# Altium PCB Vobla.PcbDoc
Units mm, origin at the board's own origin, x right, y up, seen from the top; angles counter-clockwise.
Board outline 67.25 x 45.25 mm, 4 copper layers (Top Signal Layer, Power Layer, Ground Layer, Bottom Signal Layer), stack 0.778 mm thick; 72 components, 42 nets, 204 pads, 80 vias.
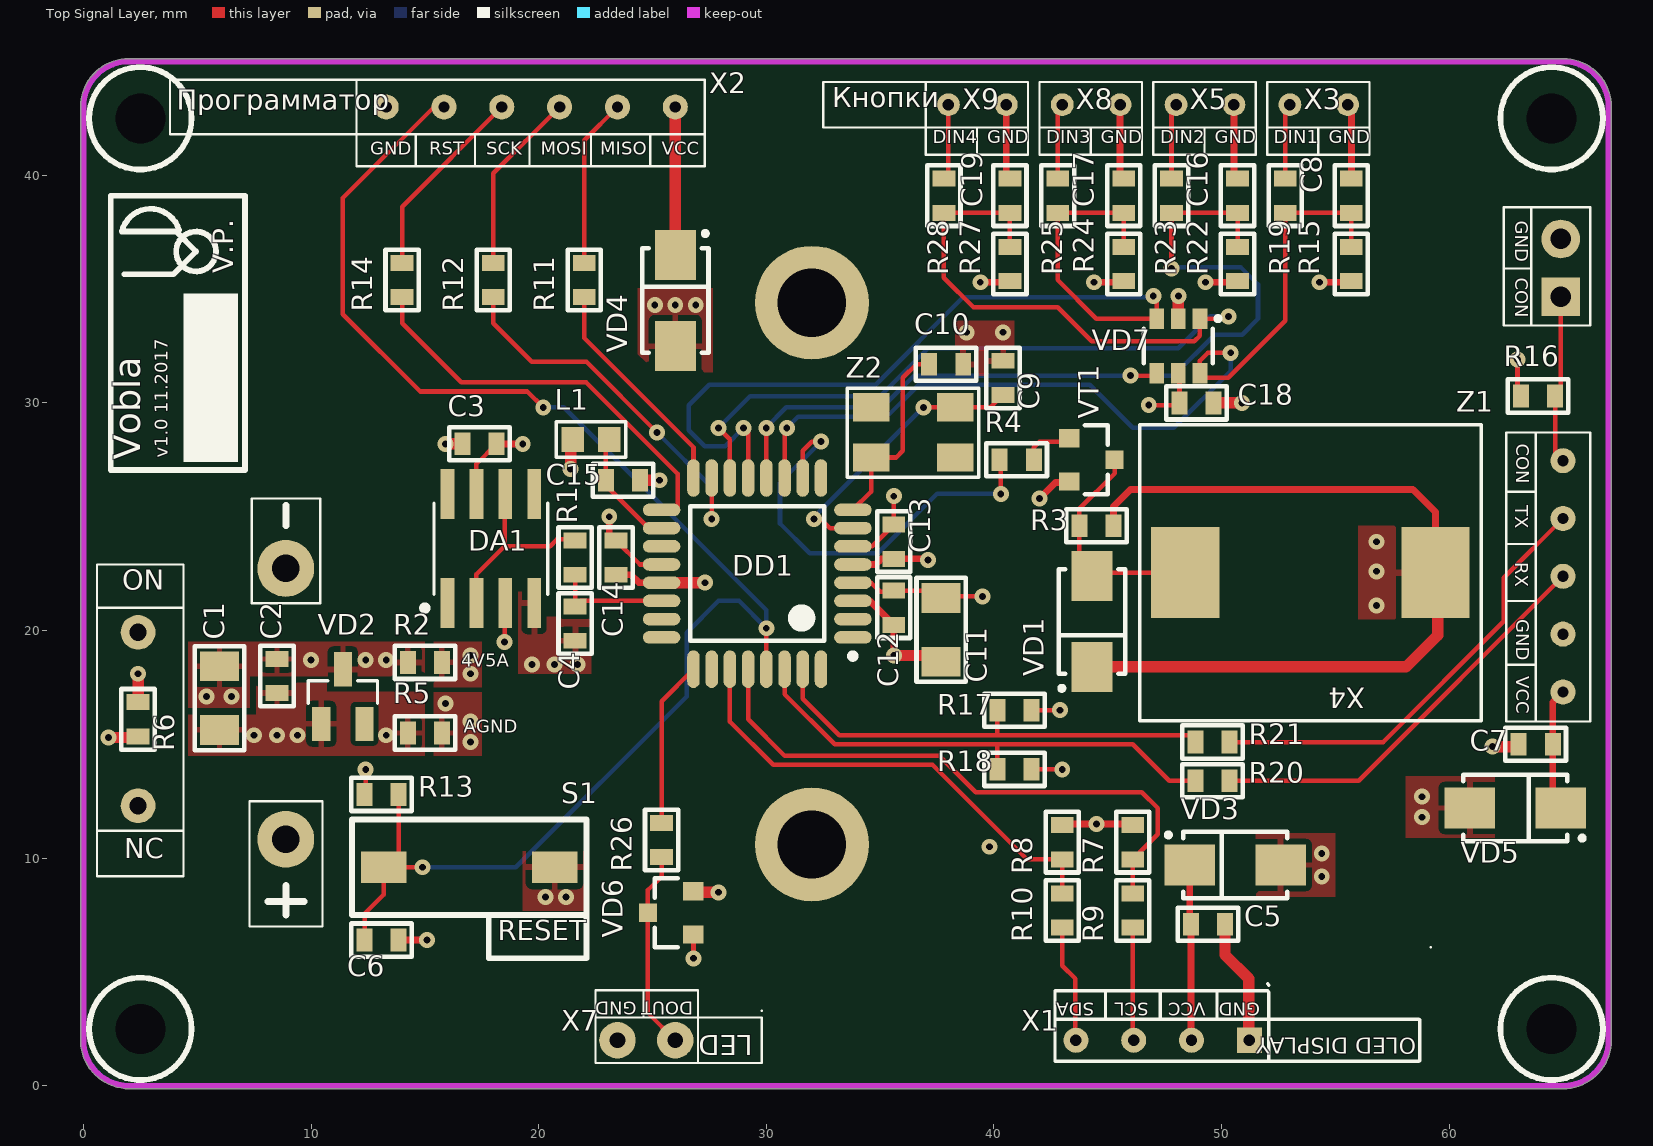
[diagram p0: Top Signal Layer view]
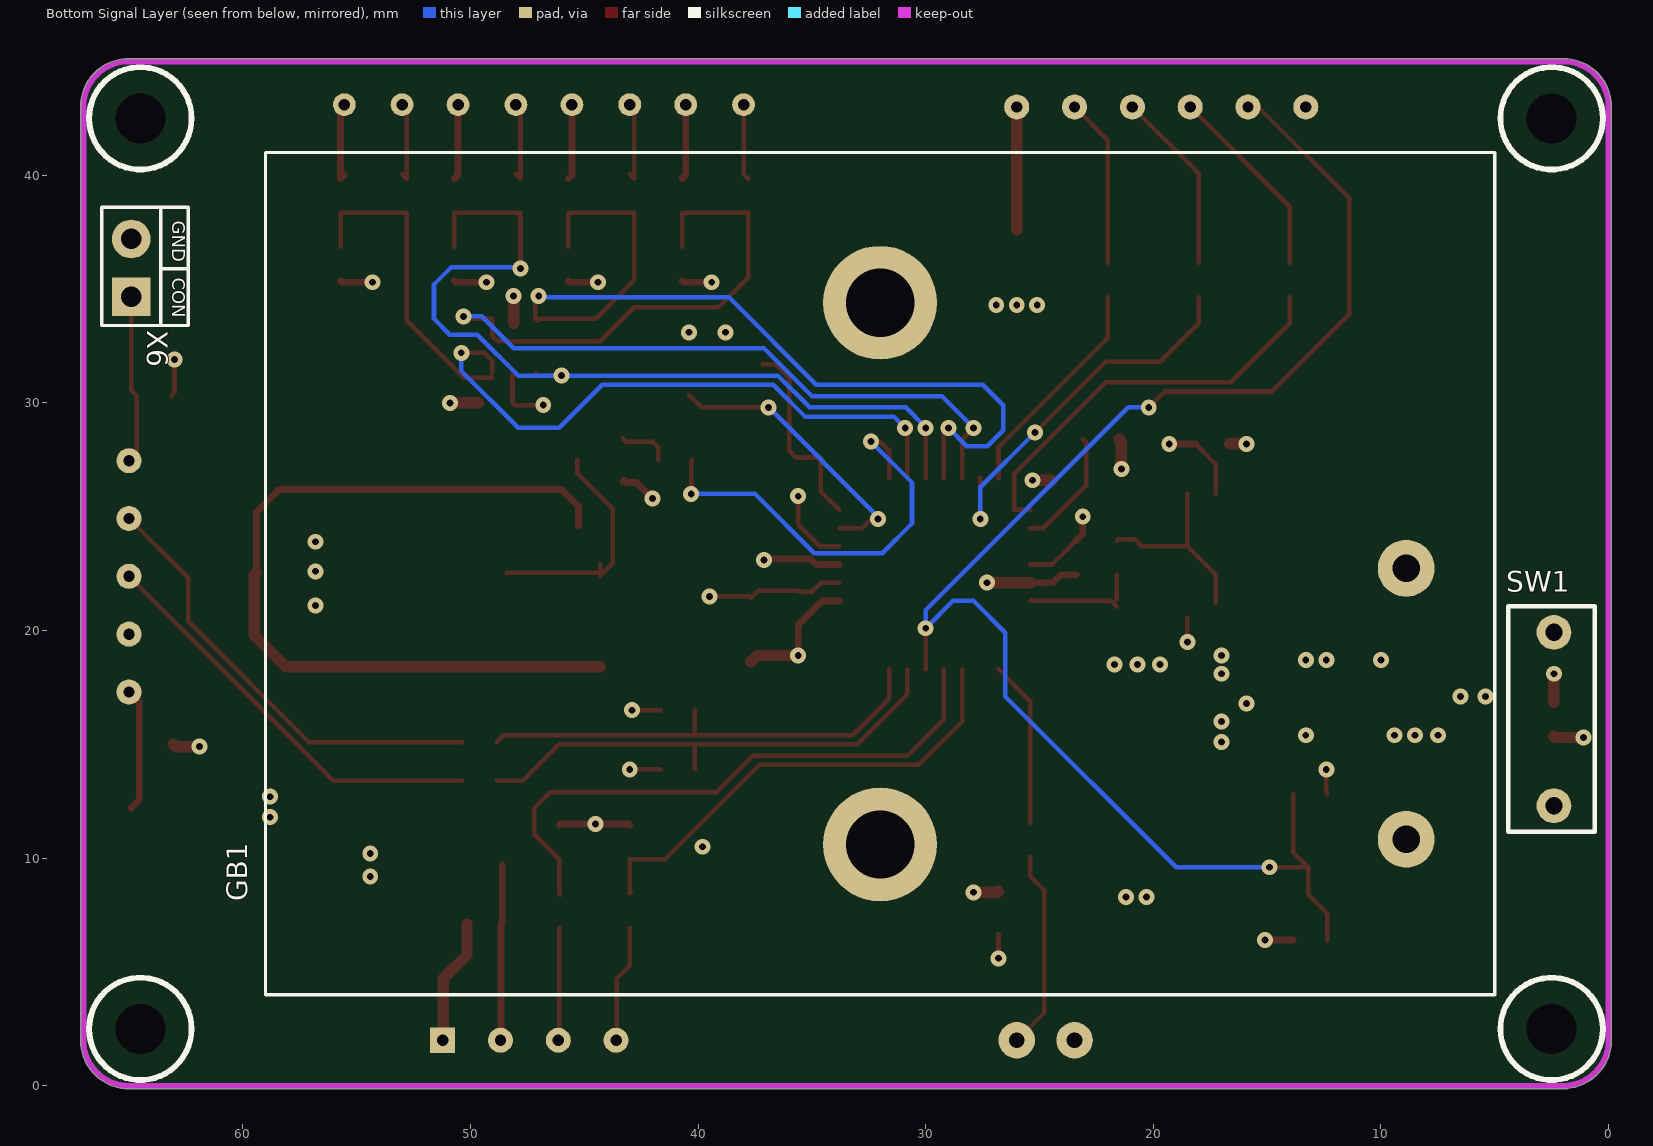
[diagram p1: Bottom Signal Layer view, seen from below]
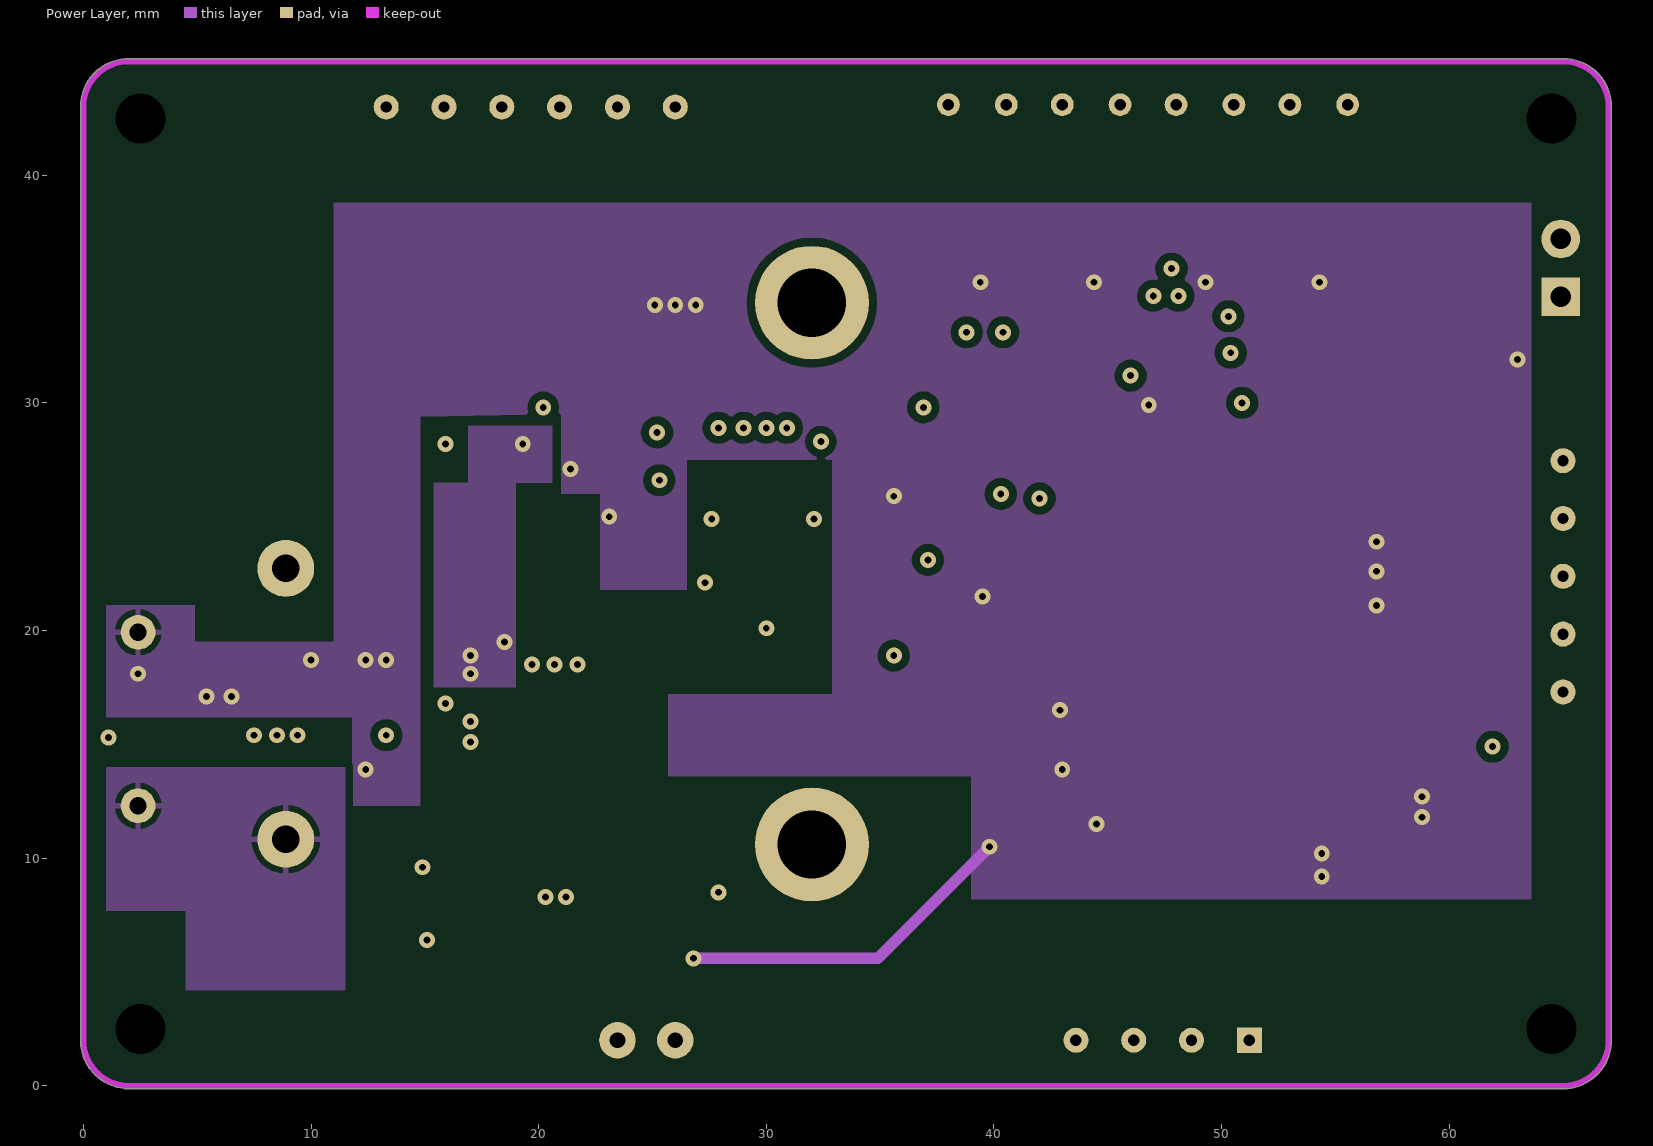
[diagram p2: Power Layer]
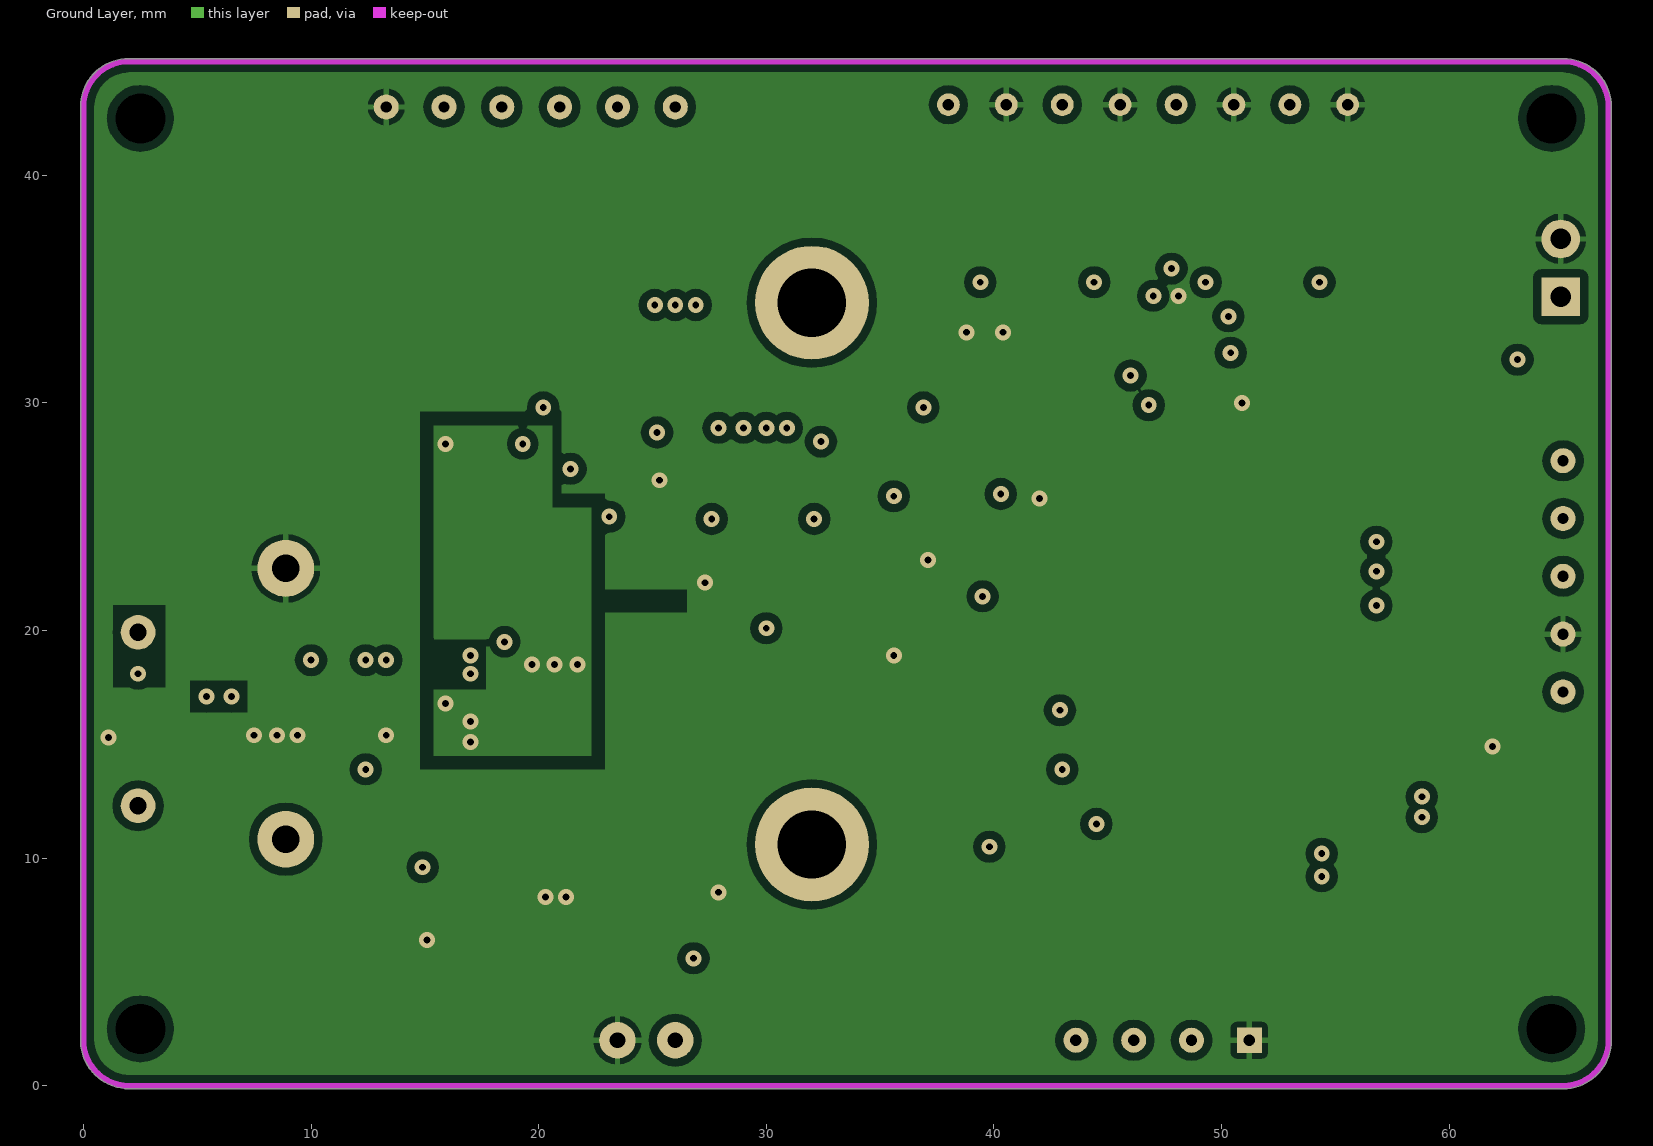
[diagram p3: Ground Layer]
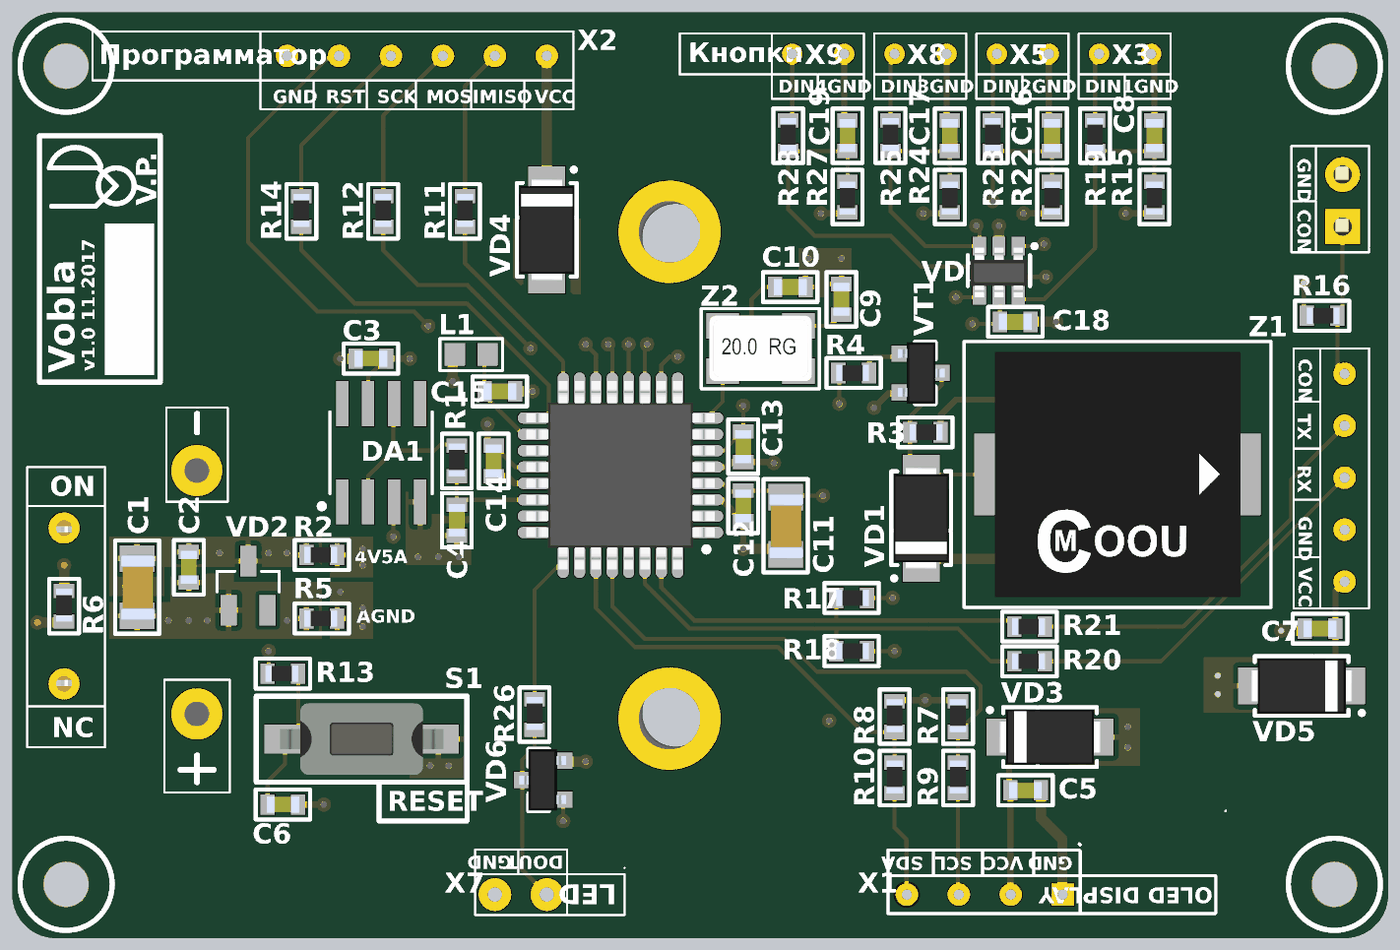
[diagram p4: 3D render of the assembled board from above, using the file's embedded part models]
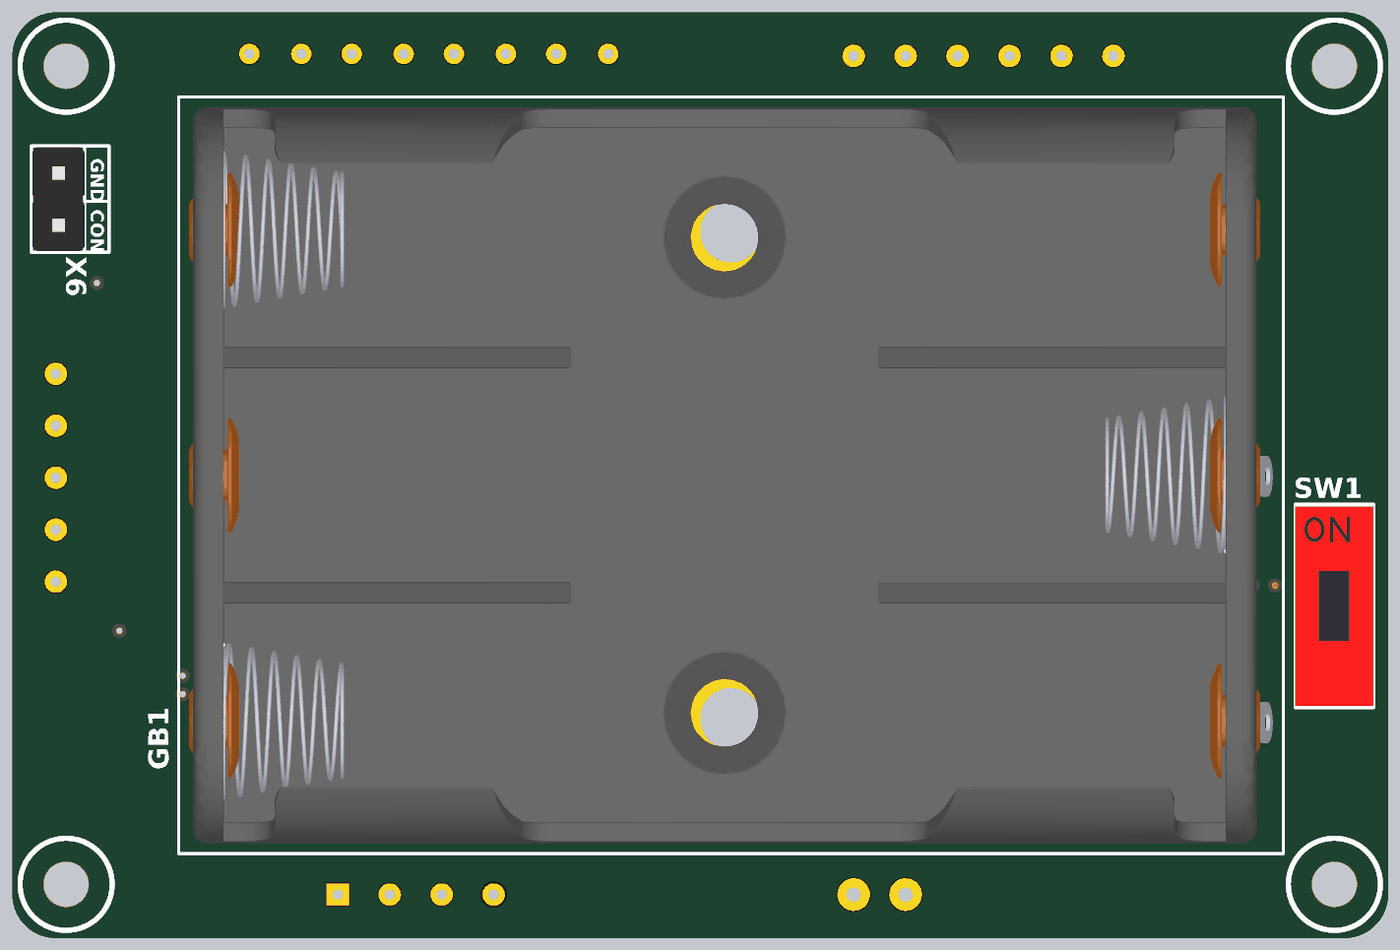
[diagram p5: 3D render of the assembled board from below, using the file's embedded part models]

## Layer stack, top to bottom
Top Solder: solder mask 0.0102, Solder Resist, Dk 3.5
Top Signal Layer: signal copper 0.0356
Dielectric 1: core 0.254, FR-4, Dk 4.2
Power Layer: signal copper 0.036
Dielectric 3: prepreg 0.127, Dk 4.2
Ground Layer: signal copper 0.036
Dielectric 2: core 0.254, FR-4, Dk 4.2
Bottom Signal Layer: signal copper 0.0356
Bottom Solder: solder mask 0.0102, Solder Resist, Dk 3.5

## Board outline
-0.125,1.8 -0.125,1.908 cw(c2,2) -0.127,2 cw(c0,2) -0.125,2.022 -0.125,42.977 cw(c0,43) -0.127,43 cw(c2,43) 2,45.127 cw(c2,45) 2.022,45.125 64.978,45.125 cw(c65,45) 65,45.127 cw(c65,43) 67.127,43 cw(c67,43) 67.125,42.978 67.125,2.022 cw(c67,2) 67.127,2 cw(c65,2) 65,-0.127 cw(c65,0) 64.978,-0.125 2.022,-0.125 cw(c2,0) 2,-0.127 cw(c2,2) -0.112,1.743 cw(c0,1.8)

## Design rules (kind name [scope] priority, off if disabled: settings)
Clearance Clearance_Inner [OnLayer('Power Layer') OR OnLayer('Ground Layer')] p1: gap=0.35 ignorepadtopadclearanceinfootprint=FALSE except(0: Arc-Hole Track-Hole SMDPad-Hole THPad-Hole Via-Hole Fill-Hole Poly-Hole Region-Hole Text-Hole)
Clearance Clearance_1 [All] p2: gap=0.2 ignorepadtopadclearanceinfootprint=FALSE except(0: Arc-Hole Track-Hole SMDPad-Hole THPad-Hole Via-Hole Fill-Hole Poly-Hole Region-Hole Text-Hole)
HoleSize [All] p1: absolutevalues=TRUE maxlimit=10 minlimit=0.025 maxpercent=80.000 minpercent=20.000
MinimumSolderMaskSliver [All] p1: minsoldermaskwidth=0.15
PolygonConnect PolygonConnect_via [IsVia] p1: connectstyle=Direct reliefconductorwidth=0.254 reliefentries=4 polygonreliefangle="90 Angle" airgapwidth=0.254
PolygonConnect PolygonConnect_1 [All] p2: connectstyle=Relief reliefconductorwidth=0.254 reliefentries=4 polygonreliefangle="90 Angle" airgapwidth=0.254
RoutingVias [All] p1: holewidth=0.711 width=1.27 viastyle="Through Hole" minholewidth=0.711 minwidth=1.27 maxholewidth=0.711 maxwidth=1.27
SilkToSilkClearance [All] p1: silktosilkclearance=0
SilkToSolderMaskClearance [IsPad] p1: minsilkscreentomaskgap=0 clearancetoexposedcopper=TRUE
SolderMaskExpansion [All] p1: expansion=0.05
Width Width_1 [All] p1: maxlimit=1 minlimit=0.1 preferedwidth=0.2
Width Width_3.3V [InNet('3,3В')] p2: maxlimit=1 minlimit=0.1 preferedwidth=0.7
26 further rules are at their usual default settings.

## Components (designator, comment, footprint, x,y, rotation, side; value= is the part's Value field where it differs from the comment)
C1 "10мк" C1206 6,17 r270 top
C2 "2,2мк" C0603 8.5,18 r270 top
C3 "0,1мк" C0603 17.4,28.2 r0 top
C4 "0,1мк" C0603 21.6,20.3 r90 top
C5 "0,1мк" C0603 49.4,7.1 r180 top
C6 "0,1мк" C0603 13.1,6.4 r180 top
C7 "0,1мк" C0603 63.8,15 r0 top
C8 "0,1мк" C0603 55.7,39.1 r270 top
C9 "16" C0603 40.4,31.1 r270 top
C10 "16" C0603 37.9,31.7 r180 top
C11 "10мк" C1206 37.7,20 r270 top
C12 "0,1мк" C0603 35.6,21 r90 top
C13 "0,1мк" C0603 35.6,23.9 r90 top
C14 "0,1мк" C0603 23.4,23.2 r90 top
C15 "0,1мк" C0603 23.7,26.6 r180 top
C16 "0,1мк" C0603 50.7,39.1 r270 top
C17 "0,1мк" C0603 45.7,39.1 r270 top
C18 "0,1мк" C0603 48.9,30 r180 top
C19 "0,1мк" C0603 40.7,39.1 r270 top
DA1 "AD8051ARZ" SO8_H 17.9,23.6 r90 top
DD1 "ATmega328P-AU" TQFP-32 29.6,22.5 r180 top
GB1 "Вход питания" KLS5-818-С 32,22.5 r180 bottom
L1 "18мГн" L0603_H 22.3,28.4 r0 top
R1 "1к" R0603 21.6,23.2 r270 top
R2 "0" R0603 15,18.6 r0 top
R3 "1к" R0603 44.5,24.6 r180 top
R4 "1к" R0603 41,27.5 r0 top
R5 "0" R0603 15,15.5 r0 top
R6 "10к" R0603 2.4,16.1 r270 top
R7 "10к" R0603 46.1,10.7 r270 top
R8 "10к" R0603 43,10.7 r270 top
R9 "47" R0603 46.1,7.7 r270 top
R10 "47" R0603 43,7.7 r270 top
R11 "47" R0603 22,35.4 r270 top
R12 "47" R0603 18,35.4 r270 top
R13 "10к" R0603 13.1,12.8 r0 top
R14 "47" R0603 14,35.4 r270 top
R15 "10к" R0603 55.7,36.1 r90 top
R16 "10к" R0603 63.9,30.3 r180 top
R17 "10к" R0603 40.9,16.5 r180 top
R18 "10к" R0603 40.9,13.9 r180 top
R19 "47" R0603 52.8,39.1 r270 top
R20 "47" R0603 49.6,13.4 r0 top
R21 "47" R0603 49.6,15.1 r0 top
R22 "10к" R0603 50.7,36.1 r90 top
R23 "47" R0603 47.8,39.1 r270 top
R24 "10к" R0603 45.7,36.1 r90 top
R25 "47" R0603 42.8,39.1 r270 top
R26 "75" R0603 25.4,10.8 r270 top
R27 "10к" R0603 40.7,36.1 r90 top
R28 "47" R0603 37.8,39.1 r270 top
S1 "RESET" "DTSM 32" 20.7,9.6 r180 top
SW1 "DS1040-01" DIP1 2.4,12.3 r180 bottom
VD1 "SS14" SMA 44.3,20.4 r90 top
VD2 "BZX84-C4V7.215" SOT23-2_H 11.4,17.1 r90 top
VD3 "SS14" SMA 50.6,9.7 r0 top
VD4 "SS14" SMA 26,34.5 r270 top
VD5 "SS14" SMA 62.9,12.2 r180 top
VD6 "BAV199" SOT23-3 25.8,7.6 r180 top
VD7 "TPD4E001" SOT23-6 48.1,32.5 r270 top
VT1 "КТ3130Б9" SOT23-3 44.3,27.5 r0 top
X1 "Модуль DIY SSD1306" 4HOLE_WIRE 43.6,2 r270 top
X2 "Программатор" 6HOLE_WIRE 26,43 r180 top
X3 "Разъем для кнопки №1" 2HOLE_BUTTON 53,43.1 r0 top
X4 "Модуль HC-11" 5HOLE_WIRE 65,17.3 r90 top
X5 "Разъем для кнопки №2" 2HOLE_BUTTON 48,43.1 r0 top
X6 "Перемычка" PLS2-2 64.9,37.2 r0 bottom
X7 "Сигнальный светодиод" 2HOLE_LED 26,2 r180 top
X8 "Разъем для кнопки №3" 2HOLE_BUTTON 43,43.1 r0 top
X9 "Разъем для кнопки №4" 2HOLE_BUTTON 38,43.1 r0 top
Z1 "PKLCS1212E4001" "PIEZOELECTRIC SOUNDER" 53.9,22.54 r0 top
Z2 "8МГц" QSMD3.2X5 34.6,29.8 r0 top

## Footprints (in the part's own frame and the unit in brackets; to place one, negate y for a bottom-side part, rotate by r counter-clockwise, add the part's x,y. Pads: shape width x height; smd on the part's side, far side on the other; paste and mask are expansions set on the pad)
2HOLE_BUTTON [mm] "Разъемы под кнопки"
  round 1 hole 0.5: 1(0,0) 2(2.54,0)
  silkscreen extent -1,-1 3.5,1
2HOLE_LED [mm] "Разъемы под светодиоды"
  round 1.6 hole 0.7: 1(0,0) 2(2.54,0)
  silkscreen extent -1,-1 3.5,1
4HOLE_WIRE [mm] "4 отверстия под провода"
  rect 1.1x1.1 hole 0.5: 1(0,7.62)
  round 1.1 hole 0.5: 2(0,5.08) 3(0,2.54)
  round 1.1 hole 0.5 mask+0.102: 4(0,0)
  silkscreen extent -0.93,-0.92 0.93,8.48
5HOLE_WIRE [mm] "5 отверстиq под провода"
  round 1.1 hole 0.5: 1(0,0) 2(2.54,0) 3(5.08,0) 4(7.62,0) 5(10.16,0)
  silkscreen extent -1.3,-1.2 11.4,1.2
6HOLE_WIRE [mm] "6 отверстий под провода"
  round 1.1 hole 0.5: 1(0,0) 2(2.54,0) 3(5.08,0) 4(7.62,0) 5(10.16,0) 6(12.7,0)
  silkscreen extent -1.3,-1.2 14,1.2
C0603 [mm]
  rect 0.7x1 smd: 1(-0.75,0) 2(0.75,0)
  silkscreen extent -1.33,-0.73 1.33,0.73, body extent -0.8,-0.4 0.8,0.4, height 0.9
C1206 [mm]
  rect 1.3x1.7 smd: 1(-1.428,-0.024) 2(1.372,-0.024)
  silkscreen extent -2.31,-1.1 2.25,1.06, body extent -1.6,-0.85 1.6,0.85, height 1.75
DIP1 [mil]
  round 60 hole 30: 1(0,0) 2(0,300)
  silkscreen extent -79,-45 71,345, body extent -80,-42 71,342, height 269
"DTSM 32" [mm] "Кнопка"
  rect 2x1.4 smd: 1(0,0) 3(7.5,0)
  silkscreen extent -1.4,-2.1 8.9,2.1, body extent -0.25,-1.75 7.75,1.75, height 5.5
KLS5-818-С [mm] "Батарейный отсек 3хААА"
  round 2.5 hole 1.2: 1(23.11,-11.67) 2(23.11,0.23)
  round 5 hole 3: ""(0,-11.9) ""(0,11.9)
  silkscreen extent -27,-18.5 27,18.5, body extent -26.49,-18 26.49,18, height 13
L0603_H [mm]
  rect 1x1.1 smd: 1(-0.8,0) 2(0.8,0)
  silkscreen extent -1.53,-0.78 1.53,0.78, body extent -0.8,-0.4 0.8,0.4, height 0.8
"PIEZOELECTRIC SOUNDER" [mm] "Пьезоэлектрический излучатель"
  rect 3x4 smd: 1(-5.5,0) 2(5.5,0)
  silkscreen extent -7.5,-6.5 7.5,6.5, body extent -6,-6 6,6, height 3.07
PLS2-2 [mm] "Разъем PLS"
  rect 1.7x1.7 hole 0.9: 1(0,2.54)
  round 1.7 hole 0.9: 2(0,0)
  silkscreen extent -1.3,-1.4 1.3,3.8, body extent -1.3,-1.34 1.24,3.74, height 11.54
QSMD3.2X5 [mm] "KX-9A 8MHz"
  rect 1.6x1.25 smd: 1(0,-2.2) 2(3.7,0) ""(0,0) ""(3.7,-2.2)
  silkscreen extent -1.05,-3.08 4.72,0.85, body extent -0.65,-2.7 4.35,0.5, height 1.01
R0603 [mm]
  rect 0.7x1 smd: 1(-0.75,0) 2(0.75,0)
  silkscreen extent -1.33,-0.73 1.33,0.73, body extent -0.85,-0.4 0.75,0.4, height 0.5
SMA [mm]
  rect 2.2x1.8 smd: 1(-2,0) 2(2,0)
  silkscreen extent -3.04,-1.46 2.29,1.46, body extent -2.5,-1.35 2.5,1.35, height 2.15
SO8_H [mm]
  rect 2.2x0.6 smd: 1(-2.4,1.905) 2(-2.4,0.635) 3(-2.4,-0.635) 4(-2.4,-1.905) 5(2.4,-1.905) 6(2.4,-0.635) 7(2.4,0.635) 8(2.4,1.905)
  silkscreen extent -2.74,-2.5 2,3.02, body extent -3.1,-2.5 3.1,2.5, height 1.75
SOT23-2_H [mm]
  rect 1.5x0.8 smd: 0(-1.2,-0.95) 1(1.2,0) 2(-1.2,0.95)
  silkscreen extent -0.3,-1.52 0.7,1.52, body extent -1.3,-1.52 1.3,1.52, height 1.12
SOT23-3 [mm]
  rect 0.9x0.8 smd: 1(-1,0.95) 2(-1,-0.95)
  rect 0.8x0.8 smd: 3(1,0)
  silkscreen extent -0.3,-1.52 0.7,1.52, body extent -1.15,-1.5 1.15,1.5, height 1.1
SOT23-6 [mm]
  rect 0.9x0.64 smd: 1(-1.2,0.95) 2(-1.2,0) 3(-1.2,-0.95) 4(1.2,-0.95) 5(1.2,0) 6(1.2,0.95)
  silkscreen extent -1.3,-1.52 0.75,1.84, body extent -1.13,-1.4 1.3,1.4, height 1.09
TQFP-32 [mm] "Thin QFP, 32-Leads, Body 7x7mm, Pitch 0.8mm, IPC Medium Density"
  oval 1.65x0.55 smd: 1(-4.2,2.8) 2(-4.2,2) 3(-4.2,1.2) 4(-4.2,0.4) 5(-4.2,-0.4) 6(-4.2,-1.2) 7(-4.2,-2) 8(-4.2,-2.8) 17(4.2,-2.8) 18(4.2,-2) 19(4.2,-1.2) 20(4.2,-0.4) 21(4.2,0.4) 22(4.2,1.2) 23(4.2,2) 24(4.2,2.8)
  oval 0.55x1.65 smd: 9(-2.8,-4.2) 10(-2,-4.2) 11(-1.2,-4.2) 12(-0.4,-4.2) 13(0.4,-4.2) 14(1.2,-4.2) 15(2,-4.2) 16(2.8,-4.2) 25(2.8,4.2) 26(2,4.2) 27(1.2,4.2) 28(0.4,4.2) 29(-0.4,4.2) 30(-1.2,4.2) 31(-2,4.2) 32(-2.8,4.2)
  silkscreen extent -4.33,-2.95 2.95,3.75, body extent -4.6,-4.6 4.6,4.6, height 1.2

## Part data
C1 C11: library part Capacitor_pol, "Конденсатор полярный"
C2 C3 C4 C5 C6 C7 C8 C9 C10 C12 C13 C14 C15 C16 C17 C18 C19: library part Capacitor, "Конденсатор"
DA1: "ОУ"
DD1: "Микроконтроллер 64-pin"
GB1: library part "Battery compartment"
L1: library part Inductor, "Катушка индуктивности"
R1 R2 R3 R4 R5 R6 R7 R8 R9 R10 R11 R12 R13 R14 R15 R16 R17 R18 R19 R20 R21 R22 R23 R24 R25 R26 R27 R28: library part Resistor_0,125Вт, "Резистор"
S1: library part Button_SMD, "Кнопка"
SW1: "DIP переключатель"
VD1 VD3 VD4 VD5: library part DiodeSchottky, "Диод Шоттки"
VD2: library part DiodeZener, "Стабилитрон"
VD6 VD7: "Диодная сборка"
X1: library part Header_4_sct, "Разъем - 4 конт. розетка"
X2: library part Header_6_sct, "Разъем - 5 конт. розетка"
X3 X5 X7 X8 X9: library part Header_2_sct, "Разъем - 2 конт. розетка"
X4: library part Header_5_sct, "Разъем - 4 конт. розетка"
X6: library part Header_2_plg, "Разъем - 2 конт. вилка"
Z1: library part Buzzer, "Пьезоизлучатель звуковой"
Z2: library part Crystal, "Кварцевый резонатор"

## Free pads (board coordinates)
  round 0 hole 2.2: ""(2.5,2.5) ""(2.5,42.5) ""(64.5,2.5) ""(64.5,42.5)

## Via types
v1: diameter 0.7, hole 0.3, Top Signal Layer to Bottom Signal Layer, tented both sides, 80 vias

## Nets (pads, with @x,y where several pads share a name; then routed paths per layer and width w, separated by ;. In a path a pad name is that pad's centre, name@x,y a point inside that pad or via, vN(x,y) a via of type N, cw(c..) or ccw(c..) an arc to the next point about the centre after c; other vN are vias at no path point)
4V5A: C3.2 DA1.3 DA1.7 R2.2 | length 4.8
  Top Signal Layer w0.2: DA1.7 17.265,27.315 C3.2 ; v1(18.5,19.5) DA1.3@18.5,20.565
  Top Signal Layer w0.3: C3.2 v1(19.3,28.2)
  other v1: 17,18.1 17,18.9
4V5D: C1.1 C2.1 C11.1 C12.2 C13.2 C14.2 C18.2 DD1.4 DD1.6 DD1.20 L1.1 R2.1 R3.1 R6.1 R7.1 R8.1 R13.1 R15.1 R16.2 R17.1 R18.1 R22.1 R24.1 R27.1 SW1.2 VD1.1 VD2.1 VD3.2 VD4.2 VD5.2 VD6.1 VD7.5 Z1.2 | length 85.7
  Top Signal Layer w0.2: R13.1 12.4,12.85 v1(12.4,13.9) ; C14.2 24.45,22.9 DD1.20 ; v1(26.8,5.6) VD6.1 ; DD1.4 34.6,22.1 35,21.7 35.55,21.7 C12.2 37.354,21.75 C11.1 37.748,21.5 v1(39.5,21.5) ; DD1.6 34.65,23.7 C13.2 v1(35.6,25.9) ; R18.1 v1(43,13.9) ; R17.1 v1(42.9,16.5) ; v1(46.8,29.9) 48.05,29.9 C18.2 48.15,31.25 VD7.5 ; v1(63,31.9) 63,30.45 R16.2
  Top Signal Layer w0.3: v1(23.1,25) 23.3,25 23.1,24.8 23.1,24.25 C14.2 ; v1(39.4,35.3) 40.65,35.3 R27.1 ; R8.1 43.05,11.5 v1(44.5,11.5) 46.05,11.5 R7.1 ; v1(44.4,35.3) 45.65,35.3 R24.1 ; R3.1 45.25,25.45 46,26.2 58.4,26.2 59.4,25.2 Z1.2 ; v1(49.3,35.3) 50.65,35.3 R22.1 ; v1(54.3,35.3) 55.65,35.3 R15.1
  Top Signal Layer w0.5: R6.1 v1(2.4,18.1) ; v1(21.4,27.1) 21.4,28.3 L1.1 ; VD1.1 58.1,18.4 59.5,19.8 59.5,22.44 Z1.2
  Power Layer w0.5: v1(26.8,5.6) 34.9,5.6 v1(39.8,10.5)
  other v1: 54.4,9.2 54.4,10.2 58.8,11.8 58.8,12.7 5.4,17.1 6.5,17.1 10,18.7 12.4,18.7 13.3,18.7 56.8,21.1 56.8,22.6 56.8,23.9 25.1,34.3 26,34.3 26.9,34.3
AGND: C3.1 C4.1 DA1.4 R5.2 | length 0.8
  Top Signal Layer w0.5: v1(15.9,28.2) C3.1
  other v1: 17,15.1 17,16 15.9,16.8 19.7,18.5 20.7,18.5 21.7,18.5
DGND: C1.2 C2.2 C5.1 C6.1 C7.1 C8.1 C9.1 C10.1 C11.2 C12.1 C13.1 C14.1 C15.1 C16.1 C17.1 C18.1 C19.1 DD1.3 DD1.5 DD1.21 GB1.2 R5.1 R6.2 S1.1 VD2.2 VD6.2 VD7.2 VT1.2 X1.1 X2.6 X3.2 X4.2 X5.2 X6.2 X7.2 X8.2 X9.2 | length 42.2
  Top Signal Layer w0.3: C6.1 v1(15.1,6.4) ; C14.1 24.05,22.45 24.4,22.1 DD1.21 ; DD1.3 34.55,21.3 C12.1 v1(35.6,18.9) ; DD1.5 34.8,22.9 35.05,23.15 C13.1 v1@37.1,23.15 ; C19.1 40.54,40.01 X9.2 X9.2@40.7,42.94 ; v1(42,25.8) 42.7,26.5 43.15,26.5 43.25,26.6 VT1.2 ; C17.1 45.54,40.01 X8.2 X8.2@45.7,42.94 ; X5.2 50.54,40.01 C16.1 ; C8.1@55.54,40.01 C8.1 55.7,42.94 X3.2
  Top Signal Layer w0.5: v1(1.1,15.3) 2.35,15.3 R6.2 ; C15.1 v1(25.3,26.6) ; DD1.21 v1(27.3,22.1) ; VD6.2 26.85,8.5 v1(27.9,8.5) ; v1(35.6,18.9) 37.404,18.9 C11.2 ; VD7.2@48.1,33.5 VD7.2 v1(48.1,34.7) ; C18.1 v1(50.9,30) ; C5.1 50.15,5.75 51.2,4.7 51.2,2.32 X1.1@51.22,2.3 ; v1(61.9,14.9) 62.95,14.9 C7.1
  other v1: 20.3,8.3 21.2,8.3 7.5,15.4 8.5,15.4 9.4,15.4 13.3,15.4 37.1,23.1 38.8,33.1 40.4,33.1
MCU_AIN: C4.2 DD1.22 R1.2 | length 5
  Top Signal Layer w0.2: C4.2 21.85,21.3 25.3,21.3 25.35,21.35 DD1.22 ; C4.2@21.6,21.35 R1.2
MCU_DIN1: C8.2 DD1.11 R15.2 R19.2 VD7.6 | length 41.1
  Top Signal Layer w0.2: DD1.11 30.8,28.8 v1(30.9,28.9) ; VD7.6@49.05,31.1 50.3,31.1 52.8,33.6 R19.2 C8.2 R15.2 ; VD7.6 49.05,31.85 49.4,32.2 v1(50.4,32.2)
  Bottom Signal Layer w0.2: v1(30.9,28.9) 31.4,29.4 35.3,29.4 36.7,30.8 44.2,30.8 46.1,28.9 47.9,28.9 50.4,31.4 v1(50.4,32.2)
MCU_DIN2: C16.2 DD1.12 R22.2 R23.2 VD7.4 | length 39.5
  Top Signal Layer w0.2: DD1.12 v1(30,28.9) ; v1(46,31.2) 47.05,31.2 VD7.4 ; v1(47.8,35.9) R23.2 C16.2 R22.2
  Bottom Signal Layer w0.2: v1(30,28.9) 30,28.919 30.881,29.8 35.1,29.8 36.5,31.2 v1(46,31.2) 47.9,31.2 49.7,33 50.9,33 51.6,33.7 51.6,35.2 50.85,35.95 47.85,35.95 v1(47.8,35.9)
MCU_DIN3: C17.2 DD1.13 R24.2 R25.2 VD7.3 | length 42.2
  Top Signal Layer w0.2: v1(29,28.9) 29.2,28.7 DD1.13 ; R24.2 C17.2 R25.2 42.8,35.4 44.5,33.7 46.95,33.7 VD7.3@47.05,33.6 ; v1(47,34.7) 47.15,34.55 VD7.3
  Bottom Signal Layer w0.2: v1(29,28.9) 28.2,28.1 27.3,28.1 26.6,28.8 26.6,29.9 27.5,30.8 34.8,30.8 38.65,34.65 46.95,34.65 v1(47,34.7)
MCU_DIN4: C19.2 DD1.14 R27.2 R28.2 VD7.1 | length 48.8
  Top Signal Layer w0.2: v1(27.9,28.9) 28.4,28.4 DD1.14 ; R27.2 C19.2 R28.2 37.8,35.5 39.1,34.2 42.8,34.2 44.3,32.7 48.8,32.7 49.05,32.95 VD7.1 50.2,33.7 v1(50.3,33.8)
  Bottom Signal Layer w0.2: v1@28.081,28.9 v1(27.9,28.9) 29.3,30.3 35,30.3 37.1,32.4 48.1,32.4 49.5,33.8 v1(50.3,33.8)
MCU_DOUT1: DD1.25 R26.1 | length 7.3
  Top Signal Layer w0.2: R26.1 25.4,16.9 DD1.25
MCU_DYN: DD1.10 R4.1 | length 19.3
  Top Signal Layer w0.2: DD1.10 31.6,27.9 32,28.3 v1(32.4,28.3) ; R4.1 40.3,27.45 v1(40.3,26)
  Bottom Signal Layer w0.2: v1(32.4,28.3) 30.6,26.5 30.6,24.7 31.9,23.4 34.9,23.4 37.5,26 v1(40.3,26)
MCU_MISO: DD1.16 R11.2 | length 9.9
  Top Signal Layer w0.2: R11.2 22,32.85 26.8,28.05 DD1.16
MCU_MOSI: DD1.15 R12.2 | length 16.9
  Top Signal Layer w0.2: R12.2 18,33.5 19.7,31.8 22.1,31.8 v1(25.2,28.7) ; v1(27.6,24.9) DD1.15
  Bottom Signal Layer w0.2: v1(25.2,28.7) 27.6,26.3 v1(27.6,24.9)
MCU_RESET: C6.2 DD1.29 R13.2 S1.3 X2.5 | length 68.6
  Top Signal Layer w0.2: C6.2 12.35,7.55 13.2,8.4 S1.3 ; R13.2 13.85,10.25 S1.3 ; v1(14.9,9.6) S1.3 ; X2.5 15.4,43 11.4,39 11.4,33.9 14.8,30.5 19.5,30.5 v1(20.2,29.8) ; DD1.29 v1(30,20.1)
  Bottom Signal Layer w0.2: v1(14.9,9.6) 19,9.6 26.5,17.1 26.5,19.9 27.9,21.3 28.8,21.3 v1(30,20.1) 30,20.9 21.1,29.8 v1(20.2,29.8)
MCU_RX: DD1.30 R18.2 R20.1 | length 21.8
  Top Signal Layer w0.2: DD1.30 30.8,17.2 33,15 40.2,15 ; R18.2 40.15,14.95 40.2,15 ; R20.1 47.7,13.4 46.1,15 40.2,15
MCU_SCK: DD1.17 R14.2 | length 18.3
  Top Signal Layer w0.2: R14.2 14,33.5 16.6,30.9 22.081,30.9 26.1,26.881 26.1,25.3 DD1.17
MCU_SCL: DD1.28 R7.2 R9.1 | length 26.1
  Top Signal Layer w0.2: DD1.28 29.2,16.1 30.8,14.5 37.6,14.5 39.2,12.9 46.5,12.9 47.2,12.2 47.2,11.05 R7.2 R9.1 R9.1@46.05,8.4
MCU_SDA: DD1.27 R8.2 R10.1 | length 21
  Top Signal Layer w0.2: DD1.27 28.4,16 30.3,14.1 37.3,14.1 41.45,9.95 R8.2 R10.1 R10.1@42.95,8.5
MCU_TX: DD1.31 R17.2 R21.1 | length 20.5
  Top Signal Layer w0.2: DD1.31 31.6,17 33.2,15.4 40.1,15.4 ; R17.2 40.15,15.45 40.1,15.4 ; R21.1 48.55,15.4 40.1,15.4
NetC5_2: C5.2 VD3.1 X1.2 | length 7.7
  Top Signal Layer w0.3: VD3.1 48.6,7.15 C5.2 48.66,7.09 X1.2@48.66,2
NetC7_2: C7.2 VD5.1 X4.1 | length 5.4
  Top Signal Layer w0.3: VD5.1 64.55,12.55 C7.2 64.55,16.85 X4.1
NetC9_2: C9.2 DD1.7 Z2.2 | length 12.5
  Top Signal Layer w0.2: v1(32.1,24.9) 32.4,24.9 32.8,24.5 DD1.7 ; v1(36.9,29.8) Z2.2 39.85,29.8 C9.2
  Bottom Signal Layer w0.2: v1(32.1,24.9) 32.1,25 v1(36.9,29.8)
NetC10_2: C10.2 DD1.8 Z2.1 | length 8.8
  Top Signal Layer w0.2: DD1.8 34.6,26.1 Z2.1 35.7,27.6 36,27.9 36,31.1 36.6,31.7 C10.2
NetC15_2: C15.2 DD1.18 L1.2 | length 5.3
  Top Signal Layer w0.2: L1.2 22.95,28.25 C15.2 22.95,26.387 24.837,24.5 DD1.18
NetDA1_2: DA1.2 DA1.6 R1.1 | length 8.6
  Top Signal Layer w0.2: DA1.2 17.265,22.465 18.5,23.7 ; DA1.6@18.5,26 18.5,23.7 ; R1.1 21.55,24 20.8,24 20.5,23.7 18.5,23.7
NetGB1_1: GB1.1 SW1.1
NetR3_2: R3.2 VD1.2 VT1.3 Z1.1 | length 10.4
  Top Signal Layer w0.2: VD1.2@44.3,22.9 VD1.2 43.75,22.95 R3.2 43.75,25.35 45.3,26.9 VT1.3 ; VD1.2@44.44,22.54 Z1.1
NetR4_2: R4.2 VT1.1 | length 2.3
  Top Signal Layer w0.2: R4.2 41.75,28.05 42,28.3 43.15,28.3 VT1.1
NetR9_2: R9.2 X1.3 | length 4.9
  Top Signal Layer w0.2: X1.3@46.1,2 R9.2
NetR10_2: R10.2 X1.4 | length 4.9
  Top Signal Layer w0.2: R10.2 43,5.28 43.58,4.7 43.58,2.32 X1.4@43.6,2.3
NetR11_1: R11.1 X2.2 | length 7.5
  Top Signal Layer w0.2: R11.1 22,41.54 X2.2
NetR12_1: R12.1 X2.3 | length 8.1
  Top Signal Layer w0.2: R12.1 18,40.08 X2.3
NetR14_1: R14.1 X2.4 | length 8.7
  Top Signal Layer w0.2: R14.1 14,38.62 X2.4
NetR16_1: R16.1 X4.5 X6.1 | length 7.4
  Top Signal Layer w0.2: X6.1 64.9,30.55 R16.1 64.65,27.81 X4.5
NetR19_1: R19.1 X3.1 | length 3.6
  Top Signal Layer w0.2: R19.1@53,40.05 R19.1 52.8,42.9 X3.1
NetR20_2: R20.2 X4.3 | length 18.4
  Top Signal Layer w0.2: R20.2 56.02,13.4 X4.3
NetR21_2: R21.2 X4.4 | length 19.8
  Top Signal Layer w0.2: R21.2 57.1,15.1 62.4,20.4 62.4,22.32 X4.4
NetR23_1: R23.1 X5.1 | length 3.6
  Top Signal Layer w0.2: R23.1@48,40.05 R23.1 47.8,42.9 X5.1
NetR25_1: R25.1 X8.1 | length 3.6
  Top Signal Layer w0.2: R25.1@43,40.05 R25.1 42.8,42.9 X8.1
NetR26_2: R26.2 VD6.3 X7.1 | length 8.8
  Top Signal Layer w0.2: R26.2 25.4,9.2 24.8,8.6 VD6.3 24.8,3.2 X7.1
NetR28_1: R28.1 X9.1 | length 3.3
  Top Signal Layer w0.2: R28.1 38,40.05 X9.1
NetVD4_1: VD4.1 X2.1 | length 5.4
  Top Signal Layer w0.5: 26,37.6 X2.1
pads on no net: DA1.1 DA1.5 DA1.8 DD1.1 DD1.2 DD1.9 DD1.19 DD1.23 DD1.24 DD1.26 DD1.32 GB1. VD2.0 Z2.

## Polygon pours and split planes (outlines as drawn)
4V5A on Power Layer "Top Layer-No Net" (solid, pour order 12): 15.4,17.5 15.4,26.5 16.9,26.5 16.9,29 17.767,29 19,29 20.6,29 20.6,26.5 19,26.5 19,17.5
4V5D on Power Layer "Top Layer-No Net" (solid, remove dead copper, pour order 2): 14.8,29.397 21,29.5 21,26 22.7,26 22.7,21.8 26.5,21.8 26.5,26 26.5,27.5 32.9,27.5 32.9,21.7 32.9,17.2 25.7,17.2 25.7,13.6 30.5,13.6 32.6,13.6 33.4,13.6 38.1,13.6 39,13.6 39,8.2 55,8.2 63.6,8.2 63.6,38.8 11,38.8 11,19.5 4.9,19.5 4.9,21.1 1,21.1 1,16.2 7.5,16.2 11.8,16.2 11.8,12.3 14.8,12.3
NetGB1_1 on Power Layer "Top Layer-No Net" (solid, remove dead copper, pour order 0): 1,14 1,7.7 4.5,7.7 4.5,4.2 11.5,4.2 11.5,14 1,14 1,13.9
DGND on Ground Layer "Top Layer-No Net" (solid, remove dead copper, pour order 6): -0.112,13.9 14.8,13.9 14.8,29.6 21,29.6 21,26 22.9,26 22.9,13.9 -0.127,13.9 -0.127,-0.125 67.125,-0.125 67.125,45.125 59.8,45.125 55.85,45.127 47.28,45.132 30.3,45.125 12.6,45.119 -0.112,45.159
AGND on Ground Layer "Top Layer-No Net" (solid, pour order 16): 15.4,14.5 15.4,29 19.7,29 20.6,29 20.6,25.4 22.3,25.4 22.3,14.5
DGND on Top Signal Layer "Top Layer-No Net" (solid, remove dead copper, pour order 34): 19.3,10.3 19.3,7.7 22.2,7.7 22.2,10.3
4V5D on Top Signal Layer "Top Layer-No Net" (solid, remove dead copper, pour order 32): 55,8.3 51.5,8.3 51.5,11.1 55,11.1
4V5D on Top Signal Layer "Top Layer-No Net" (solid, remove dead copper, pour order 28): 60.9,20.5 56,20.5 56,24.6 60.9,24.6 60.9,20.5
4V5D on Top Signal Layer "Top Layer-No Net" (solid, remove dead copper, pour order 24): 27.654,31.346 27.654,35.046 24.354,35.046 24.354,32.146 25.154,31.346
AGND on Top Signal Layer "Top Layer-No Net" (solid, remove dead copper, pour order 20): 19.1,21.7 19.1,18.1 22.3,18.1 22.3,20.6 20.1,20.6 20.1,21.7
AGND on Top Signal Layer "Top Layer-No Net" (solid, remove dead copper, pour order 18): 15.4,14.5 17.5,14.5 17.5,17.3 15.4,17.3 15.4,14.5
4V5A on Top Signal Layer "Top Layer-No Net" (solid, remove dead copper, pour order 14): 15.4,17.5 17.5,17.5 17.5,19.5 15.4,19.5
DGND on Top Signal Layer "Top Layer-No Net" (solid, remove dead copper, pour order 10): 4.6,16.3 7.6,16.3 7.6,17.7 10.7,17.7 10.7,17.3 15,17.3 15,14.5 4.6,14.5
4V5D on Top Signal Layer "Top Layer-No Net" (solid, remove dead copper, pour order 8): 4.6,19.5 4.6,16.6 7.3,16.6 7.3,18 15,18 15,19.5
DGND on Top Signal Layer "Top Layer-No Net" (solid, remove dead copper, pour order 36): 38.3,31.2 38.3,33.6 40.9,33.6 40.9,31.2 38.3,31.2
4V5D on Top Signal Layer "Top Layer-No Net" (solid, remove dead copper, pour order 38): 62,13.6 58.1,13.6 58.1,10.9 62,10.9 62,13

## Keep-outs
Keep-Out Layer:
  lines w0.25: 0,1.8 0,43 ; 2,0 65,0 ; 2,45 65,45 ; 67,2 67,43
  lines w0.254: 0,2 ccw(c2,2) 2,0 ; 0,43 cw(c2,43) 2,45 ; 65,0 ccw(c65,2) 67,2 ; 65,45 cw(c65,43) 67,43

## Other copper
Top Signal Layer:
  pour cut-out: 1.1,44.2 1.5,44.6 1.7,44.6 2.7,44.8 3.7,44.5 4.4,43.7 4.8,42.5 4.5,41.4 3.8,40.6 2.8,40.2 1.6,40.4 1,40.8 0.4,41.8 0.3,42.9 0.6,43.7
  pour cut-out: 63.1,44.2 63.5,44.6 63.7,44.6 64.7,44.8 65.7,44.5 66.4,43.7 66.8,42.5 66.5,41.4 65.8,40.6 64.8,40.2 63.6,40.4 63,40.8 62.4,41.8 62.3,42.9 62.6,43.7
  pour cut-out: 63.1,4.2 63.5,4.6 63.7,4.6 64.7,4.8 65.7,4.5 66.4,3.7 66.8,2.5 66.5,1.4 65.8,0.6 64.8,0.2 63.6,0.4 63,0.8 62.4,1.8 62.3,2.9 62.6,3.7
  pour cut-out: 1.1,4.2 1.5,4.6 1.7,4.6 2.7,4.8 3.7,4.5 4.4,3.7 4.8,2.5 4.5,1.4 3.8,0.6 2.8,0.2 1.6,0.4 1,0.8 0.4,1.8 0.3,2.9 0.6,3.7
Ground Layer:
  pour cut-out: 22.7,21.8 26.5,21.8 26.5,20.8 22.7,20.8
  pour cut-out: 15.4,17.394 17.694,17.394 17.698,19.606 15.404,19.606
  pour cut-out: 1.3,21.1 1.3,17.5 3.6,17.5 3.6,21.1
  pour cut-out: 4.7,17.8 7.2,17.8 7.2,16.4 4.7,16.4
Bottom Signal Layer:
  pour cut-out: 1.1,44.2 1.5,44.6 1.7,44.6 2.7,44.8 3.7,44.5 4.4,43.7 4.8,42.5 4.5,41.4 3.8,40.6 2.8,40.2 1.6,40.4 1,40.8 0.4,41.8 0.3,42.9 0.6,43.7
  pour cut-out: 63.1,44.2 63.5,44.6 63.7,44.6 64.7,44.8 65.7,44.5 66.4,43.7 66.8,42.5 66.5,41.4 65.8,40.6 64.8,40.2 63.6,40.4 63,40.8 62.4,41.8 62.3,42.9 62.6,43.7
  pour cut-out: 63.1,4.2 63.5,4.6 63.7,4.6 64.7,4.8 65.7,4.5 66.4,3.7 66.8,2.5 66.5,1.4 65.8,0.6 64.8,0.2 63.6,0.4 63,0.8 62.4,1.8 62.3,2.9 62.6,3.7
  pour cut-out: 1.1,4.2 1.5,4.6 1.7,4.6 2.7,4.8 3.7,4.5 4.4,3.7 4.8,2.5 4.5,1.4 3.8,0.6 2.8,0.2 1.6,0.4 1,0.8 0.4,1.8 0.3,2.9 0.6,3.7

## Silkscreen, mask and mechanical layers (free items; w line width, h text height)
Top Overlay:
  circle w0.254: c2.5,42.5 r2.25
  circle w0.254: c64.5,42.5 r2.25
  circle w0.254: c64.5,2.5 r2.25
  circle w0.254: c2.5,2.5 r2.25
  circle w0.254: c4.95,36.65 r0.875
  rectangle: 4.4,27.4 6.8,34.8
  lines w0.1: 12,44.2 3.8,44.2 3.8,41.8 12,41.8 12,40.4 27.3,40.4 27.3,41.8 ; 14.6,40.4 14.6,41.8 ; 17.2,40.4 17.2,41.8 ; 19.6,40.4 19.6,41.8 ; 22.3,40.4 22.3,41.8 ; 22.5,3 22.5,4.2 27,4.2 27,3 29.8,3 29.8,1 27,1 ; 24.6,3 24.6,4.2 ; 24.9,40.4 24.9,41.8 ; 39.25,40.95 39.25,42.1 ; 42,42.1 42,40.9 46.5,40.9 46.5,42.1 ; 44.25,40.95 44.25,42.1 ; 47,42.1 47,40.9 51.5,40.9 51.5,42.1 ; 49.25,40.95 49.25,42.1 ; 52,42.1 52,40.9 56.5,40.9 56.5,42.1 ; 54.25,40.95 54.25,42.1 ; 59.175,6.075 59.2,6.1 ; 62.4,35.9 63.6,35.9 ; 62.5,18.5 63.8,18.5 ; 62.5,21.3 63.8,21.3 ; 62.5,23.8 63.8,23.8 ; 62.5,26.1 63.8,26.1 ; 63.6,33.4 63.6,38.6 ; 63.8,16 62.5,16 62.5,28.7 63.8,28.7 ; 0.6,11.2 0.6,21 ; 0.6,11.2 4.4,11.2 ; 0.6,11.2 0.6,9.2 4.4,9.2 4.4,11.2 ; 0.6,21 4.4,21 ; 0.6,21 0.6,22.9 4.4,22.9 4.4,21 ; 4.4,11.2 4.4,21 ; 32.5,42.1 37,42.1 37,40.9 41.5,40.9 41.5,42.1 ; 32.5,42.1 32.5,42.1 ; 32.5,42.1 32.5,44.1 37,44.1 ; 37,44.1 37,44.1 ; 41.5,42.1 41.5,42.1 ; 7.3,7 10.5,7 10.5,12.5 7.3,12.5 7.3,7 ; 7.4,21.2 7.4,21.3 7.4,25.8 10.4,25.8 10.4,21.2 7.4,21.2 ; 29.8,1.3 29.8,1.3 ; 29.8,3.3 29.8,3.3 ; 62.4,33.4 66.2,33.4 66.2,33.6 66.2,38.6 62.4,38.6 62.4,33.4
  lines w0.15: 42.68,2.93 42.68,4.18 52.02,4.18 ; 44.9,2.93 44.9,4.18 ; 47.3,2.93 47.3,4.18 ; 49.8,2.93 49.8,4.18 ; 52.02,4.48 52.08,4.42 ; 52.08,1.07 58.67,1.07 ; 52.08,4.12 52.08,2.93 58.67,2.93 ; 58.7,1.1 58.7,2.9
  lines w0.25: 1.8,35.65 3.6,35.65 3.95,35.65 4.95,36.65 4.075,37.525 1.8,37.525 ; 2.7,37.525 4.15,37.525 ; 17.8,7.5 17.8,5.6 22.1,5.6 22.1,7.5 ; 1.2,27.05 1.2,39.1 7.1,39.1 7.1,27.05 1.2,27.05
  lines w0.254: 1.683,37.526 cw(c2.952,37.219) 4.2,37.6
  lines w0.3: 8.1,8.1 9.7,8.1 ; 8.9,7.5 8.9,8.8 ; 8.9,24.6 8.9,25.5
  text "Кнопки" at 32.9,42.7 h1.5
  text "Программатор" at 4.1,42.6 h1.5
  text "DIN4" at 37.3,41.2 h1
  text "GND" at 39.7,41.2 h1
  text "DIN3" at 42.3,41.2 h1
  text "GND" at 44.7,41.2 h1
  text "DIN2" at 47.3,41.2 h1
  text "GND" at 49.7,41.2 h1
  text "DIN1" at 52.3,41.2 h1
  text "GND" at 54.7,41.2 h1
  text "GND" at 12.6,40.7 h1
  text "RST" at 15.2,40.7 h1
  text "SCK" at 17.7,40.7 h1
  text "MOSI" at 20.1,40.7 h1
  text "MISO" at 22.7,40.7 h1
  text "VCC" at 25.4,40.7 h1
  text "GND" at 62.7,38 h1 r270
  text "V.P." at 6.9,35.7 h1.52 r90
  text "CON" at 62.7,35.5 h1 r270
  text "CON" at 62.75,28.2 h1 r270
  text "v1.0 11.2017" at 3.9,27.6 h1 r90
  text "Vobla" at 2.9,27.5 h2 r90
  text "TX" at 62.7,25.5 h1 r270
  text "RX" at 62.7,23 h1 r270
  text "ON" at 1.7,21.5 h1.5
  text "GND" at 62.75,20.5 h1 r270
  text "4V5A" at 16.6,18.2 h1
  text "VCC" at 62.75,18 h1 r270
  text "AGND" at 16.7,15.3 h1
  text "NC" at 1.8,9.7 h1.5
  text "RESET" at 18.2,6.1 h1.5
  text "GND" at 24.3,3.9 h1 r180
  text "DOUT" at 26.8,3.9 h1 r180
  text "SDA" at 44.4,3.85 h1 r180
  text "SCL" at 46.8,3.85 h1 r180
  text "VCC" at 49.3,3.85 h1 r180
  text "GND" at 51.7,3.85 h1 r180
  text "LED" at 29.4,2.5 h1.5 r180
  text "OLED DISPLAY" at 58.55,2.35 h1.2 r180
Bottom Overlay:
  circle w0.254: c2.5,42.5 r2.25
  circle w0.254: c64.5,42.5 r2.25
  circle w0.254: c64.5,2.5 r2.25
  circle w0.254: c2.5,2.5 r2.25
  lines w0.15: 62.4,35.9 63.6,35.9 ; 63.6,33.4 62.4,33.4 62.4,38.6 63.6,38.6
  text "GND" at 63.3,38 h1 r90
  text "CON" at 63.3,35.5 h1 r90